# EAGLE board charlieplate7 (EAGLE 6.2)
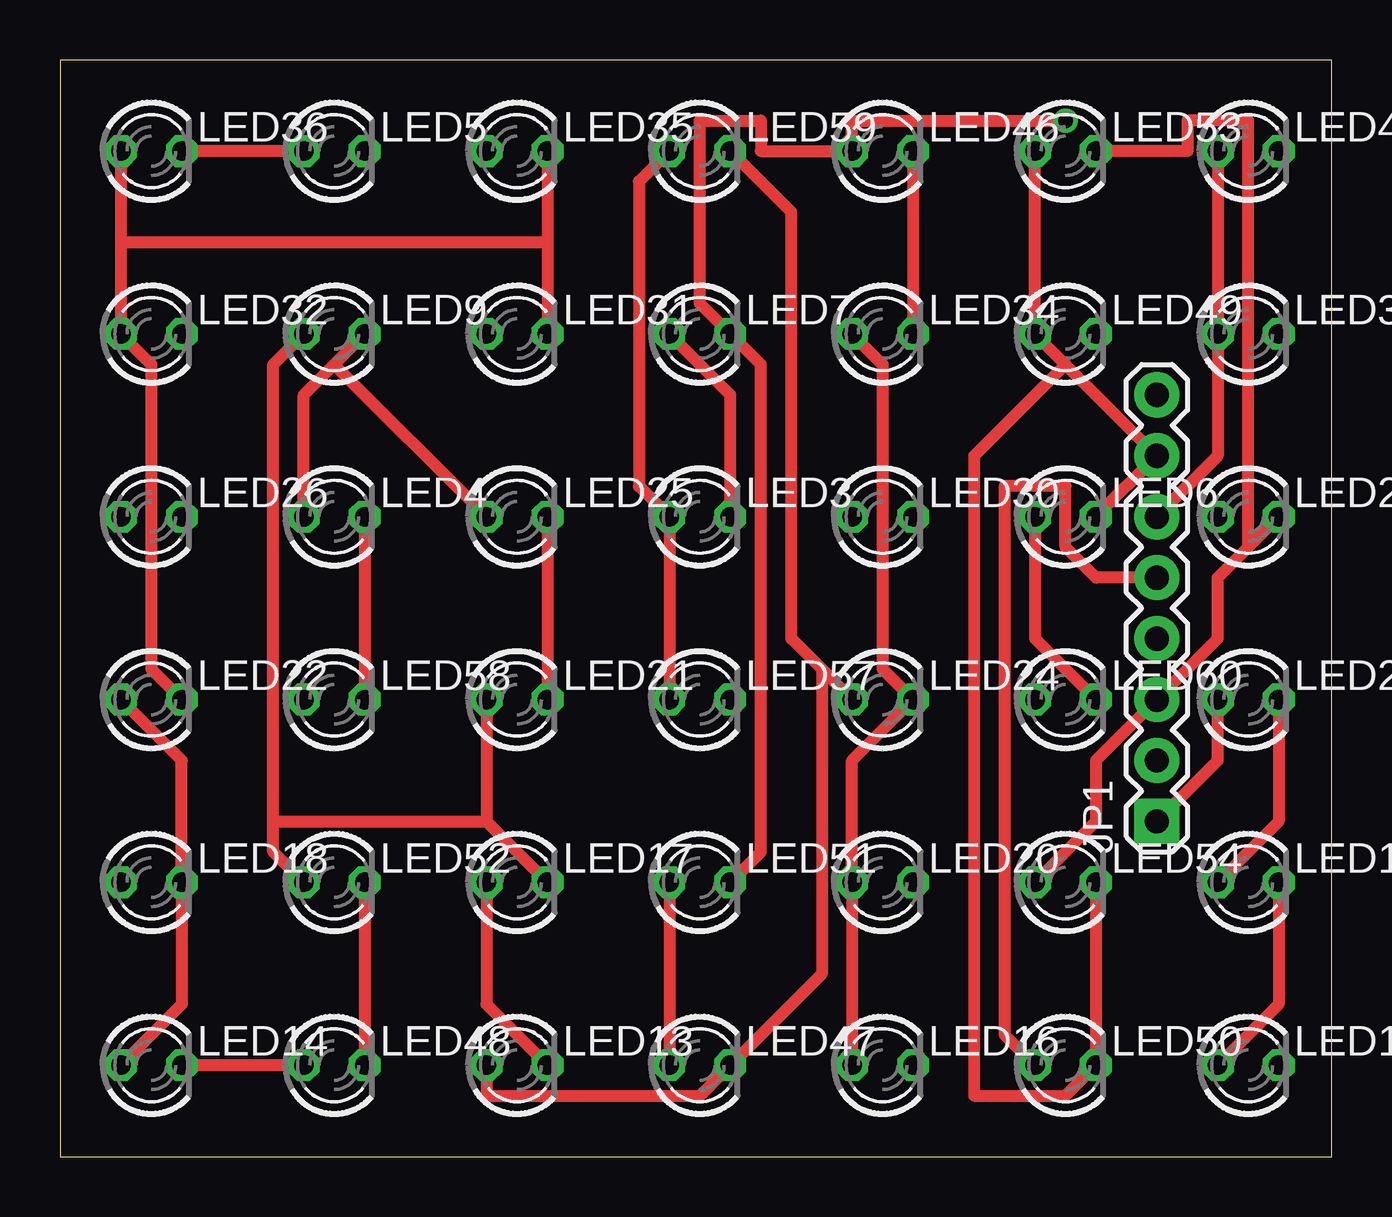
[diagram p0: board, top side]
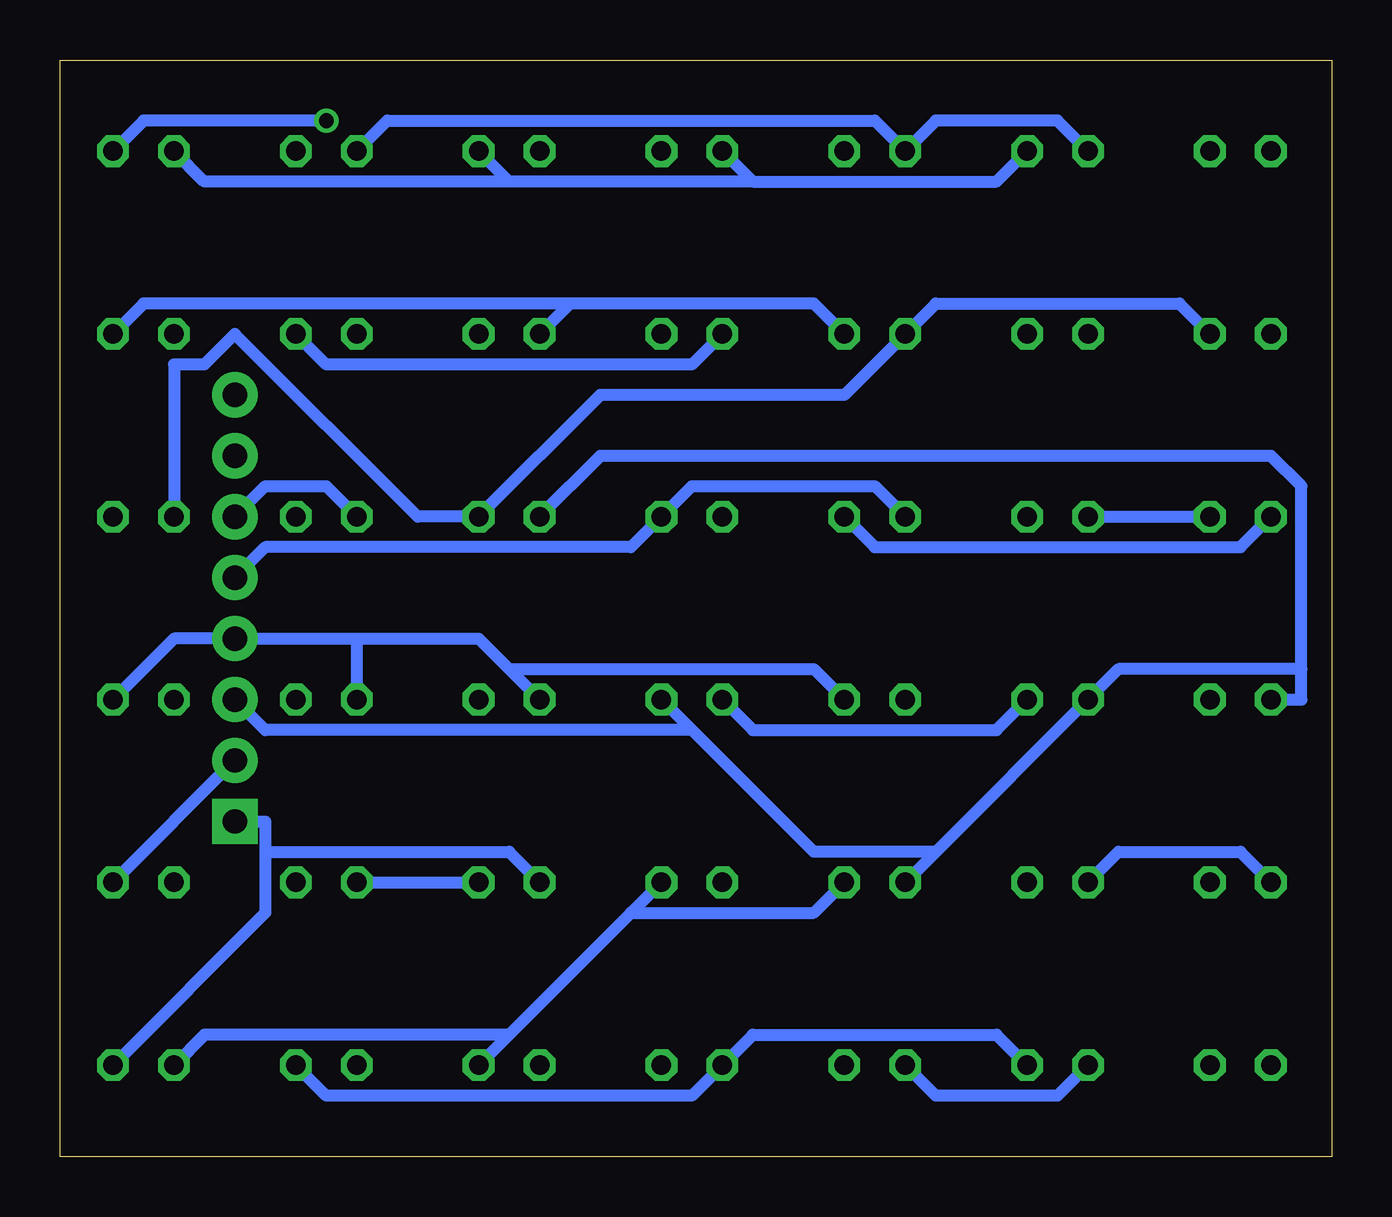
[diagram p1: board, bottom side, seen from below]

Size 53.01 x 45.71 mm. Coordinates in mm from the lower left corner, seen from the top.
Outline: 0,0 53.01,0 53.01,45.71 0,45.71 0,0
Copper layers (1*16): Top 0.035mm / dielectric 1.5mm / Bottom 0.035mm
Design rules: minimum track width 20mil, minimum drill 24mil, track to track 8mil, track to pad 8mil, pad to pad 8mil, via to via 8mil, smd to smd 8mil, copper to edge 40mil, drill to drill 8mil, minimum pad ring 10mil, minimum via ring 8mil, stop-mask expansion 4mil, vias tented up to drill 0mil, thermal gap 10mil

## Footprints (pad centres in the part's own frame; a part is rotated, then mirrored left to right if it is on the bottom)
1X08 = drill 1.016 pad 1.88 square: 1 0,0 | drill 1.016 pad 1.88: 2 2.54,0; 3 5.08,0; 4 7.62,0; 5 10.16,0; 6 12.7,0; 7 15.24,0; 8 17.78,0
LED3MM = drill 0.813 octagon: A -1.27,0; K 1.27,0

## Placement (x,y rotation side)
JP1  [1X08]  45.72,13.97 90 top
LED3  [LED3MM]  26.67,26.67 0 top
LED4  [LED3MM]  11.43,26.67 0 top
LED5  [LED3MM]  11.43,41.91 0 top
LED6  [LED3MM]  41.91,26.67 0 top
LED7  [LED3MM]  26.67,34.29 0 top
LED9  [LED3MM]  11.43,34.29 0 top
LED13  [LED3MM]  19.05,3.81 0 top
LED14  [LED3MM]  3.81,3.81 0 top
LED15  [LED3MM]  49.53,3.81 0 top
LED16  [LED3MM]  34.29,3.81 0 top
LED17  [LED3MM]  19.05,11.43 0 top
LED18  [LED3MM]  3.81,11.43 0 top
LED19  [LED3MM]  49.53,11.43 0 top
LED20  [LED3MM]  34.29,11.43 0 top
LED21  [LED3MM]  19.05,19.05 0 top
LED22  [LED3MM]  3.81,19.05 0 top
LED23  [LED3MM]  49.53,19.05 0 top
LED24  [LED3MM]  34.29,19.05 0 top
LED25  [LED3MM]  19.05,26.67 0 top
LED26  [LED3MM]  3.81,26.67 0 top
LED29  [LED3MM]  49.53,26.67 0 top
LED30  [LED3MM]  34.29,26.67 0 top
LED31  [LED3MM]  19.05,34.29 0 top
LED32  [LED3MM]  3.81,34.29 0 top
LED33  [LED3MM]  49.53,34.29 0 top
LED34  [LED3MM]  34.29,34.29 0 top
LED35  [LED3MM]  19.05,41.91 0 top
LED36  [LED3MM]  3.81,41.91 0 top
LED45  [LED3MM]  49.53,41.91 0 top
LED46  [LED3MM]  34.29,41.91 0 top
LED47  [LED3MM]  26.67,3.81 0 top
LED48  [LED3MM]  11.43,3.81 0 top
LED49  [LED3MM]  41.91,34.29 0 top
LED50  [LED3MM]  41.91,3.81 0 top
LED51  [LED3MM]  26.67,11.43 0 top
LED52  [LED3MM]  11.43,11.43 0 top
LED53  [LED3MM]  41.91,41.91 0 top
LED54  [LED3MM]  41.91,11.43 0 top
LED57  [LED3MM]  26.67,19.05 0 top
LED58  [LED3MM]  11.43,19.05 0 top
LED59  [LED3MM]  26.67,41.91 0 top
LED60  [LED3MM]  41.91,19.05 0 top

## Library data of the parts
JP1 = SparkFun
LED3-LED7 LED9 LED13-LED26 LED29-LED36 LED45-LED54 LED57-LED60 = 0-svo

## Nets
N$3: LED29.A LED30.K LED31.A LED32.K
N$5: JP1.1 LED15.K LED16.A LED20.A LED22.K LED23.A LED24.K LED31.K LED32.A LED33.K LED34.A LED35.K LED36.A
N$9: JP1.3 LED13.K LED14.A LED17.A LED18.K LED20.K LED22.A LED29.K LED30.A LED53.K LED54.A LED57.K LED58.A
N$10: JP1.6 LED3.A LED4.K LED5.K LED6.A LED33.A LED34.K LED45.A LED46.K LED57.A LED58.K LED59.A LED60.K
N$11: JP1.4 LED13.A LED14.K LED19.A LED21.K LED23.K LED24.A LED25.K LED26.A LED47.K LED48.A LED59.K LED60.A
N$14: JP1.5 LED3.K LED4.A LED7.A LED9.K LED25.A LED26.K LED49.K LED50.A
N$15: JP1.7 LED5.A LED6.K LED35.A LED36.K LED47.A LED48.K LED49.A LED50.K LED51.A LED52.K LED53.A LED54.K
N$16: JP1.2 LED7.K LED9.A LED15.A LED16.K LED17.K LED18.A LED19.K LED21.A LED45.K LED46.A LED51.K LED52.A

## Tracks (layer width: path | path; a pad name or v marks a point on that pad's centre or on a via)
N$3
  Bottom 0.508: LED32.K 6.35,35.56 16.51,35.56 LED31.A 20.32,31.75 30.48,31.75 LED30.K 38.1,26.67 45.72,34.29 46.99,33.02 48.26,33.02 LED29.A
N$5
  Top 0.508: LED16.A LED20.A 33.02,16.51 LED24.K 34.29,20.32 34.29,33.02 LED34.A | LED23.A 48.26,16.51 JP1.1 | LED36.A 2.54,38.1 | 2.54,38.1 LED32.A 3.81,33.02 3.81,20.32 LED22.K | LED35.K 20.32,38.1 | 20.32,38.1 LED31.K | 20.32,38.1 2.54,38.1
  Bottom 0.508: LED15.K 44.45,10.16 44.45,12.7 | 44.45,12.7 44.45,13.97 JP1.1 | LED20.A 34.29,12.7 44.45,12.7 | 31.75,35.56 LED34.A | 31.75,35.56 21.59,35.56 LED31.K | LED33.K 49.53,35.56 31.75,35.56
N$9
  Top 0.508: 49.53,25.4 48.26,24.13 48.26,21.59 JP1.3 43.18,16.51 43.18,13.97 LED54.A | 49.53,25.4 LED29.K | LED53.K 46.99,41.91 46.99,43.18 49.53,43.18 49.53,25.4 | LED13.K 17.78,6.35 LED17.A | LED14.A 5.08,6.35 LED18.K 5.08,16.51 LED22.A
  Bottom 0.508: LED54.A LED20.K | LED17.A 16.51,12.7 | 16.51,12.7 LED58.A 8.89,20.32 1.27,20.32 | 26.67,17.78 21.59,12.7 16.51,12.7 | 26.67,17.78 LED57.K | LED30.A 30.48,29.21 2.54,29.21 1.27,27.94 1.27,20.32 | 1.27,20.32 1.27,19.05 LED22.A | JP1.3 44.45,17.78 26.67,17.78
N$10
  Top 0.508: LED4.K LED58.K | LED57.A LED3.A 24.13,27.94 24.13,40.64 LED59.A | LED60.K 40.64,21.59 LED6.A | LED45.A LED33.A 48.26,29.21 JP1.6 | LED46.K LED34.K
  Bottom 0.508: LED58.K 13.97,17.78 24.13,17.78 LED57.A | LED6.A 41.91,27.94 44.45,27.94 JP1.6 | LED5.K 13.97,40.64 24.13,40.64 | LED59.A 24.13,40.64 | 34.29,40.64 LED46.K | 24.13,40.64 34.29,40.64 | LED45.A 46.99,40.64 34.29,40.64
N$11
  Top 0.508: LED25.K LED21.K | LED48.A LED14.K | LED13.A 17.78,2.54 26.67,2.54 LED47.K 31.75,7.62 31.75,20.32 | LED19.A 50.8,13.97 LED23.K | LED59.K 30.48,39.37 30.48,21.59 31.75,20.32 | LED24.A 31.75,20.32
  Bottom 0.508: LED26.A 3.81,25.4 19.05,25.4 LED25.K | LED13.A 16.51,2.54 11.43,2.54 LED48.A | 34.29,20.32 35.56,21.59 40.64,21.59 | 34.29,20.32 LED24.A | 40.64,21.59 JP1.4 48.26,21.59 LED23.K | 40.64,21.59 LED60.A | LED21.K 21.59,20.32 34.29,20.32
N$14
  Top 0.508: LED50.A 39.37,5.08 39.37,27.94 41.91,27.94 41.91,25.4 43.18,24.13 JP1.5 | 11.43,33.02 10.16,31.75 LED4.A | 11.43,33.02 LED9.K | 11.43,33.02 LED25.A | LED7.A 27.94,31.75 LED3.K
  Bottom 0.508: LED4.A LED26.K | LED49.K 41.91,33.02 26.67,33.02 LED7.A | LED25.A 19.05,27.94 26.67,27.94 LED3.K 29.21,25.4 44.45,25.4 JP1.5
N$15
  Top 0.508: LED54.K LED50.K 41.91,2.54 38.1,2.54 38.1,29.21 41.91,33.02 | LED52.K LED48.K | LED51.A LED47.A | LED5.A LED36.K | 41.91,33.02 JP1.7 LED6.K | 41.91,33.02 LED49.A LED53.A
  Bottom 0.508: LED48.K 13.97,5.08 24.13,5.08 LED47.A 26.67,2.54 41.91,2.54 LED50.K | LED5.A 11.43,43.18 16.51,43.18 LED35.A 19.05,43.18 39.37,43.18 LED53.A
N$16  (via drill 0.61)
  Top 0.508: 17.78,13.97 LED17.K | LED21.A 17.78,13.97 | LED9.A 8.89,33.02 8.89,13.97 | 8.89,13.97 8.89,12.7 LED52.A | 8.89,13.97 17.78,13.97 | LED15.A 50.8,6.35 LED19.K | LED51.K 29.21,12.7 29.21,33.02 LED7.K 26.67,35.56 26.67,43.18 29.21,43.18 29.21,41.91 LED46.A 33.02,43.18 v41.91,43.18
  Bottom 0.508: LED18.A 3.81,12.7 8.89,12.7 LED52.A | LED19.K JP1.2 | LED16.K 34.29,5.08 | 34.29,5.08 29.21,10.16 | 29.21,10.16 LED51.K | LED45.K 49.53,43.18 v41.91,43.18 | LED15.A 46.99,5.08 34.29,5.08 | LED17.K 21.59,10.16 29.21,10.16